# Altium PCB PCB.PcbDoc
Units mil, origin at the board's own origin, x right, y up, seen from the top; angles counter-clockwise.
Board outline 5250.03 x 2650.03 mil, 2 copper layers (Top Layer, Bottom Layer); 33 components, 44 nets, 150 pads, 4 vias.
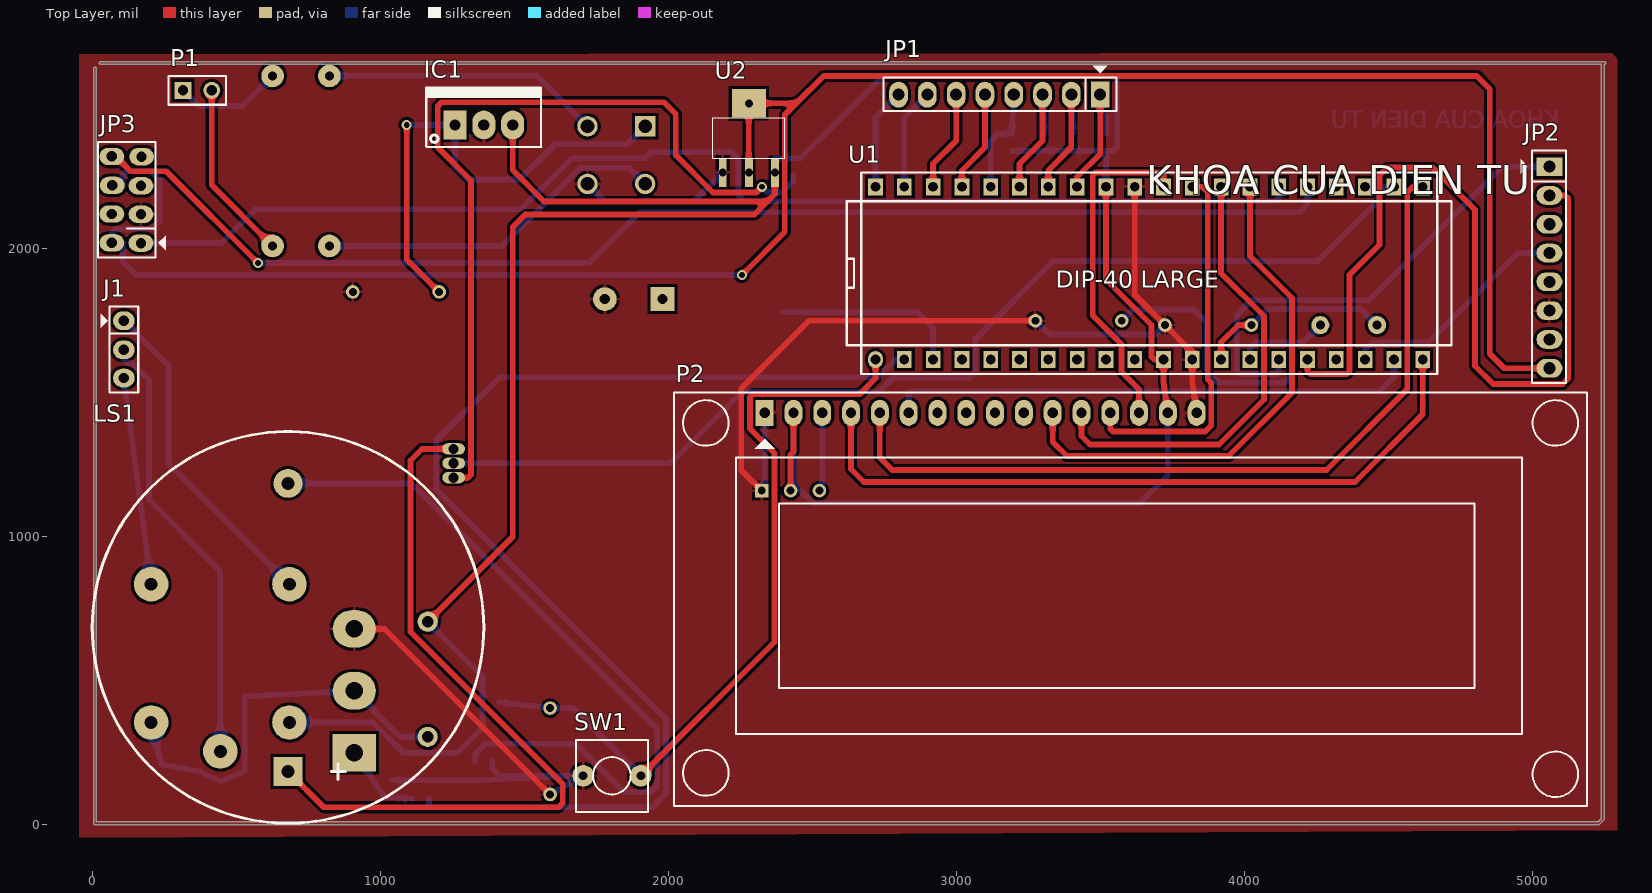
[diagram p0: Top Layer view]
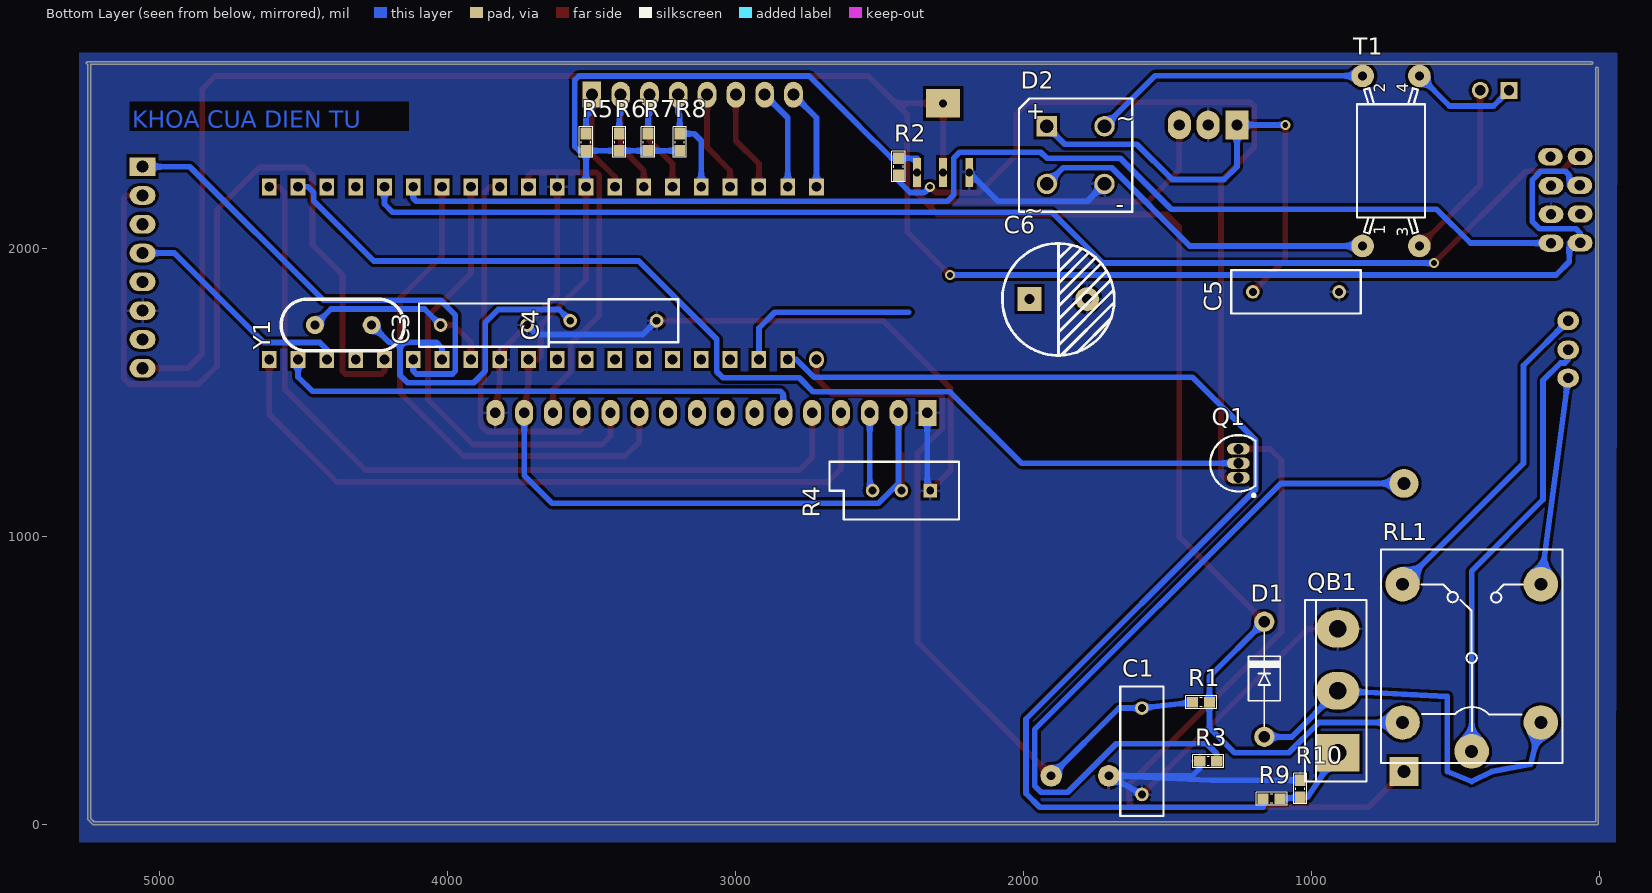
[diagram p1: Bottom Layer view, seen from below]

## Layer stack, top to bottom
Top Solder: solder mask 0.4, Solder Resist, Dk 3.5
Top Layer: signal copper 1.4
Dielectric 1: dielectric 12.6, FR-4, Dk 4.8
Bottom Layer: signal copper 1.4
Bottom Solder: solder mask 0.4, Solder Resist, Dk 3.5

## Board outline
4.99,5 ccw(c10,5) 10,-0.01 5230,-0.01 ccw(c5230,5) 5233.56,1.47 5233.55,1.45 5248.55,16.45 5248.53,16.44 ccw(c5245,20) 5250.02,20 5250.02,2637.92 5253.55,2641.45 5253.53,2641.44 ccw(c5250,2645) 5255.02,2645 ccw(c5250,2645) 5250,2650.01 30,2650.01 ccw(c30,2645) 30,2639.99 5239.98,2639.99 5239.98,22.08 5227.92,10.01 15.01,10.01 15.01,2625 ccw(c10,2625) 4.99,2625

## Design rules (kind name [scope] priority, off if disabled: settings)
Clearance [All] p1: gap=10
PolygonConnect [All] p1: connectstyle=Relief reliefconductorwidth=10 reliefentries=4 polygonreliefangle="90 Angle" airgapwidth=10
RoomDefinition schematic [InComponentClass('schematic')] p1: confinementstyle=ConfineIn formatcopy=TRUE lockcomponents=FALSE outline 6130,355 16020,355 16020,3645 6130,3645
RoutingVias [All] p1: holewidth=20 width=35 viastyle="Through Hole" minholewidth=15 minwidth=25 maxholewidth=28 maxwidth=50
SMDNeckDown [All] p1: percent=50.000
SolderMaskExpansion [All] p1: expansion=4
Width [All] p1: maxlimit=50 minlimit=10 preferedwidth=20
30 further rules are at their usual default settings.

## Classes and differential pairs
component class schematic: C1 C3 C4 C5 C6 D1 J1 JP1 JP2 JP3 LS1 P1 P2 Q1 QB1 R1 R2 R3 R4 R5 R6 R7 R8 R9 R10 RL1 SW1 T1 U1 U2 Y1

## Components (designator, comment, footprint, x,y, rotation, side; value= is the part's Value field where it differs from the comment)
C1 "Cap" RAD-0.3 1590,255 r90 bottom
C3 "Cap" RAD-0.3 3875,1735 r0 bottom
C4 "Cap" RAD-0.3 3425,1750 r0 bottom
C5 "Cap" RAD-0.3 1055,1850 r0 bottom
C6 "1000uF" "tu hoa 10mm" 1880,1825 r180 bottom
D1 "Diode" DIO-1A 1165,305 r90 bottom
D2 "Bridge1" D-38 1820,2325 r180 bottom
IC1 "LM7805" QTO-220 1260,2430 r0 top
J1 "Jumper 3" JP3 110,1650 r270 top
JP1 "JP8 PIN" JP8 3500,2535 r180 top
JP2 "JP8 PIN" JP8 5060,2285 r270 top
JP3 "Connector 4x2" JP4x2 120,2170 r90 top
LS1 "Còi Chip 5V 9.5x12MM" SP1 680,185 r0 top
P1 "Header 2" HDR1X2 315,2550 r0 top
P2 "LCD16x2" LCD16X2 2335,1430 r0 top
Q1 "2N3906" TO-92A 1255,1255 r180 bottom
QB1 "D718" QTO-247 910,250 r90 bottom
R1 "10k" "tro smd 0603" 1385,425 r180 bottom
R2 "10k" "tro smd 0603" 2435,2285 r90 bottom
R3 "10k" "tro smd 0603" 1360,220 r180 bottom
R4 "RPot" VR5 2425,1160 r0 bottom
R5 "330" "tro smd 0603" 3520,2370 r90 bottom
R6 "330" "tro smd 0603" 3405,2370 r90 bottom
R7 "330" "tro smd 0603" 3305,2370 r90 bottom
R8 "330" "tro smd 0603" 3195,2370 r90 bottom
R9 "1k" "tro smd 0603" 1140,90 r180 bottom
R10 "10k" "tro smd 0603" 1040,125 r90 bottom
RL1 "Relay 10A/12V" RL_SPDT_10A 445,255 r90 bottom
SW1 "SW" SW2 1705,170 r0 top
T1 "Trans" TRANS 725,2305 r90 bottom
U1 "PIC16F877A-E/P" DIP.100/40/W.600/L2.100 3670,1915 r0 top
U2 "LM1117-3.3V" LM1117-Hole 2280,2315 r0 top
Y1 "20MHz" XTAL 4365,1735 r0 bottom

## Footprints (in the part's own frame and the unit in brackets; to place one, negate y for a bottom-side part, rotate by r counter-clockwise, add the part's x,y. Pads: shape width x height; smd on the part's side, far side on the other; paste and mask are expansions set on the pad)
D-38 [mm] "Bridge Rectifier; 4 Terminals; Body 9.4 x 9.4 mm (typ); Pitch 5.08 mm"
  rect 1.8x1.8 hole 1.2: 1(-2.54,2.54)
  round 1.8 hole 1.2: 2(-2.54,-2.54) 3(2.54,-2.54) 4(2.54,2.54)
  silkscreen extent -5,-5 5,5, body extent -5,-5 5,5, height 9.91
DIO-1A [mil]
  round 70 hole 40: 1(0,0) 2(400,0)
  silkscreen extent 35,-55 365,55, body extent -11,-50 411,54, height 102
DIP.100/40/W.600/L2.100 [mil]
  oval 51.18x59.06 hole 34: 1(-950,-300)
  rect 51x59 / inner round 58 / far side rect 51x59 hole 34: 2(-850,-300) 3(-750,-300) 4(-650,-300) 5(-550,-300) 6(-450,-300) 7(-350,-300) 8(-250,-300) 9(-150,-300) 10(-50,-300) 11(50,-300) 12(150,-300) 13(250,-300) 14(350,-300) 15(450,-300) 16(550,-300) 17(650,-300) 18(750,-300) 19(850,-300) 20(950,-300) 21(950,300) 22(850,300) 23(750,300) 24(650,300) 25(550,300) 26(450,300) 27(350,300) 28(250,300) 29(150,300) 30(50,300) 31(-50,300) 32(-150,300) 33(-250,300) 34(-350,300) 35(-450,300) 36(-550,300) 37(-650,300) 38(-750,300) 39(-850,300) 40(-950,300)
  silkscreen extent -1050,-350 1050,350, body extent -1032,-305 1032,305, height 224
HDR1X2 [mm] "Connector; Header; 2 Position"
  rect 1.5x1.5 hole 0.9: 1(0,0)
  round 1.5 hole 0.9: 2(2.54,0)
  silkscreen extent -1.27,-1.27 3.81,1.27
JP3 [mil] "Jumper 3"
  oval 65x75 hole 36: 1(-100,0) 2(1,0) 3(99,0)
  silkscreen extent -150,-81 150,50, body extent -150,-60 150,55, height 355
JP4x2 [mil] "Connector 4x2"
  oval 60x86 hole 36: 1(-150.5,-49.5) 2(-50.5,-49.5) 3(48.5,-49.5) 4(149.5,-51.5) 5(-149.5,51.5) 6(-49.5,51.5) 7(50,50) 8(150.5,51.5)
  silkscreen extent -200,-135 200,101, body extent -197,-100 203,100, height 335
JP8 [mil] "JP8"
  rect 65x90 hole 42: 1(0,0)
  oval 65x90 hole 42: 2(100,0) 3(200,0) 4(300,0) 5(400,0) 6(500,0) 7(600,0) 8(700,0)
  silkscreen extent -56,-100 752,57, body extent -48,-50 748,48, height 323
LCD16X2 [mil] "LCD dipslay 16x2, 16 pin"
  rect 62x90 hole 36: 1(0,0)
  oval 62x90 hole 36: 2(100,0) 3(200,0) 4(300,0) 5(400,0) 6(500,0) 7(600,0) 8(700,0) 9(800,0) 10(900,0) 11(1000,0) 12(1100,0) 13(1200,0) 14(1300,0) 15(1400,0) 16(1500,0)
  silkscreen extent -315,-1365 2855,70, body extent -315,-1360 2855,77, height 914
LM1117-Hole [mm]
  rect 0.7x2.54 hole 0.7: 1(-2.3,-1.27) 2(0,-1.27) 3(2.3,-1.27)
  rect 3x2.54 hole 0.7: 2(0,4.826)
  silkscreen extent -3.17,0 3.17,3.56, body extent -3.25,-1.7 3.25,5.26, height 1.68
QTO-220 [mil] "TO-220 - 1-2-3"
  rect 80x100 hole 39: 1(0,0)
  oval 80x100 hole 39: 2(100,0) 3(200,0)
  silkscreen extent -100,-76 300,130, body extent -119,-64 322,121, height 755
QTO-247 [mil] "TO-247"
  rect 130x150 hole 60: 1(0,0)
  oval 130x150 hole 60: 2(215,0) 3(430,0)
  silkscreen extent -100,-100 530,113, body extent -89,-78 511,102, height 941
RAD-0.3 [mm] "Radial Cap, Thru-Hole; 2 Leads; 0.3 in Pin Spacing"
  round 1.2 hole 0.7: 1(-3.81,0) 2(3.81,0)
  silkscreen extent -5.71,-1.91 5.71,1.91
RL_SPDT_10A [mil] "Relay SPDT, 5 pin, 10A,W 650mil, L 800mil, H 800mil"
  round 120 hole 45: 1(0,0) 2(580,240) 3(580,-240) 4(100,-240) 5(100,240)
  silkscreen extent -40,-315 700,315
SP1 [mil] "Speaker Telphone on Broad"
  rect 100x100 hole 45: 1(0,0)
  round 100 hole 45: 2(0,1000)
  silkscreen extent -680,-180 680,1180, body extent -667,-175 652,1144, height 383
SW2 [mil] "SW button 2pin, 250x 250 mil"
  round 75 hole 31: 1(0,0) 2(200,0)
  silkscreen extent -25,-125 225,125
TO-92A [mm] "TO, Flat Index; 3 In-Line, Axial Leads; Body Dia. 4.5mm; Leads 0.51 x 0.48 mm (max)"
  oval 2x1 hole 0.9: 1(0,-1.27) 2(0,0) 3(0,1.27)
  silkscreen extent -2.48,-2.95 1.5,2.48, body extent -2.48,-2.5 1.5,2.5, height 6.86
TRANS [mm] "Transformer; 4 Leads"
  round 2 hole 0.8: 1(-7.5,2.5) 2(7.5,2.5) 3(-7.5,-2.5) 4(7.5,-2.5)
  silkscreen extent -6.4,-3 6.4,3
"tro smd 0603" [mm] "Chip Capacitor, 2-Leads, Body 1,60x0,80mm, IPC Medium Density"
  rect 1x0.95 smd mask+0.076: 1(-0.75,0) 2(0.75,0)
  silkscreen extent -1.35,-0.58 1.37,0.58, body extent -0.82,-0.42 0.82,0.43, height 0.44
"tu hoa 10mm" [mm]
  rect 2.1x2.1 hole 0.9: 1(-2.54,0)
  round 2.1 hole 0.9: 2(2.54,0)
  silkscreen extent -4.95,-4.96 4.93,4.92, body extent -5,-5 5.01,5, height 20.01
VR5 [mm] "Thru-Hole; 3 Leads"
  rect 1.2x1.2 hole 0.7: 1(-2.54,0)
  round 1.2 hole 0.7: 2(0,0) 3(2.54,0)
  silkscreen extent -5.08,-2.54 6.35,2.54
XTAL [mm]
  round 1.6 hole 0.8: 1(-2.552,0.001) 2(2.448,0.001)
  silkscreen extent -5.44,-2.29 5.44,2.29, body extent -5.55,-2.32 5.62,2.35, height 3.63

## Part data
C1 C3 C4 C5: "Capacitor"
C6: library part "Tu Hoa 1500uF 16V 10x20", "C?m"
D1: "Default Diode"
D2: "Full Wave Diode Bridge"
IC1: library part LM78xx, "On ap +, from + 5 to + 24VDC"
J1: library part JP3
JP1 JP2: library part JP8
JP3: library part "Header 4X2", "Header, 4-Pin, Dual row"
LS1: library part "Coi Chip 5V", "C?m"
P1: "Header, 2-Pin"
P2: library part "LCD Text"
Q1: "PNP General Purpose Amplifier"
QB1: "Transistor Power Supply"
R1 R2 R3 R10: library part "Tro 0603 1% 10k", "Dán"
R4: "Potentiometer"
R5 R6 R7 R8 R9: library part "Tro 0603 1% 1k", "Dán"
RL1: library part "Relay 1", "Relay SPDT,10A - 12VDC 5 Pin"
SW1: library part SW2, "Switch button 2 pin"
T1: "Transformer (12V-6VA)"
U1: "Enhanced FLASH Microcontroller, 8K (x14-Bit words) FLASH, 368 Bytes RAM, 40-Pin PDIP, Standard VDD Range, Extended Temperature"
U2: library part LM1117, "800mA Low-Dropout Linear Regulator"
Y1: library part XTAL, "Crystal Oscillator"

## Via types
v1: diameter 35, hole 20, Top Layer to Bottom Layer, tented both sides, 4 vias

## Nets (pads, with @x,y where several pads share a name; then routed paths per layer and width w, separated by ;. In a path a pad name is that pad's centre, name@x,y a point inside that pad or via, vN(x,y) a via of type N, cw(c..) or ccw(c..) an arc to the next point about the centre after c; other vN are vias at no path point)
3.3V: JP2.8 JP3.5 JP3.7 U2.2 | length 7544.8
  Top Layer w20: v1(2256,1909) 2405,2058 2405,2465 2445,2505 ; U2.2@2280,2265 2280,2505 2445,2505 ; JP2.8 4903,1585 4853,1635 4853,2555 4808,2600 2540,2600 2445,2505
  Bottom Layer w20: JP3.7 106,2220 106,2255 120,2269 205,2269 235,2239 235,2095 209.5,2069.5 83,2069.5 68.5,2055 JP3.5 106,2020.5 106,1955 152,1909 v1(2256,1909)
5V: D1.2 IC1.3 P2.2 P2.15 R1.2 R2.2 R4.2 R5.1 R6.1 R7.1 R8.1 RL1.5 U1.11 U1.32 U2.3 | length 9890.7
  Top Layer w20: D1.2 1460,1000 1460,2075 1504,2119 2300,2119 2345,2164 ; IC1.3 1460,2273 1569,2164 2345,2164 ; U2.3 2370.55,2189.55 2345,2164 ; R4.2 2425,1285 2435,1295 P2.2 ; U1.32 3520,1893 3678,1735 3678,1625 3688,1615 U1.11 3720,1538 P2.15
  Bottom Layer w18.7: U2.3@2370.55,2314.53 R2.2 2460,2314.53 2574,2428.53 ; R5.1 3545.47,2340.47 3559,2354 3559,2586
  Bottom Layer w20: RL1.5 975,355 1080,250 1268.47,250 1355.47,337 R1.2 1355.47,514.53 D1.2 ; U2.3 U2.3@2370.55,2314.53 ; P2.2 2435,1186 2505,1116 3638,1116 3735,1213 P2.15 ; 2574,2428.53 2745.47,2600 3545,2600 3559,2586 ; R8.1 R7.1 R6.1 R5.1 U1.32
A0: R9.1 U1.2 | length 4169.5
  Bottom Layer w20: R9.1 1169.53,61 1945,61 1992.5,108.5 1992.5,367.5 1195,1165 1195,1335 1414,1554 2729,1554 2790,1615 U1.2
B0: JP1.1 R5.2 U1.33 | length 496.9
  Top Layer w20: U1.33 3420,2249 3500,2329 JP1.1
  Bottom Layer w20: JP1.1 3500,2477 3520,2457 R5.2
B1: JP1.2 R6.2 U1.34 | length 490.7
  Top Layer w20: U1.34 3320,2272 3400,2352 JP1.2
  Bottom Layer w20: JP1.2 3400,2469 3405,2464 R6.2
B2: JP1.3 R7.2 U1.35 | length 490.7
  Top Layer w20: U1.35 3220,2295 3300,2375 JP1.3
  Bottom Layer w20: JP1.3 3300,2469 3305,2464 R7.2
B3: JP1.4 R8.2 U1.36 | length 382.7
  Bottom Layer w20: U1.36 3120,2375 3144.53,2399.53 R8.2 3195,2464 3200,2469 JP1.4
B4: JP1.5 U1.37 | length 353.1
  Top Layer w20: U1.37 3020,2272 3100,2352 JP1.5
B5: JP1.6 U1.38 | length 353.1
  Top Layer w20: U1.38 2920,2295 3000,2375 JP1.6
B6: JP1.7 U1.39 | length 353.1
  Bottom Layer w20: U1.39 2820,2455 JP1.7
B7: JP1.8 U1.40 | length 353.1
  Bottom Layer w20: U1.40 2720,2455 JP1.8
CS: JP2.1 U1.15 | length 1688.6
  Bottom Layer w20: U1.15 4120,1575 4110,1565 3984,1565 3974,1575 3974,1770 4025,1821 4432,1821 4896,2285 JP2.1
D0: P2.6 U1.19 | length 1834.9
  Bottom Layer w20: P2.6 2835,1495 2845,1505 4470,1505 4520,1555 U1.19
D1: P2.4 U1.20 | length 2486
  Top Layer w20: P2.4 2635,1235 2680,1190 4385,1190 4620,1425 U1.20
D2: P2.5 U1.21 | length 2865.1
  Top Layer w20: P2.5 2735,1275 2778,1232 4286,1232 4566,1512 4566,2195 4586,2215 U1.21
D3: Q1.2 U1.22 | length 3745.8
  Bottom Layer w20: Q1.2 2008,1255 2256,1503 2731,1503 2780,1552 3045,1552 3066,1573 3066,1686 3337,1957 4257,1957 4466,2166 4466,2195 4486,2215 U1.22
D4: P2.11 U1.27 | length 1818.3
  Top Layer w20: P2.11 3335,1330 3385,1280 3946,1280 4166,1500 4166,1829 4020,1975 U1.27
D5: P2.12 U1.28 | length 1591.8
  Top Layer w20: P2.12 3435,1350 3465,1320 3913,1320 4069,1476 4069,1766 3920,1915 U1.28
D6: P2.13 U1.29 | length 1295.1
  Top Layer w20: P2.13 3535,1375 3545,1365 3865,1365 3886,1386 3886,1534 3874,1546 3874,2195 3854,2215 U1.29
D7: P2.14 U1.30 | length 1186
  Top Layer w20: P2.14 3635,1512 3574,1573 3574,1668 3474,1768 3474,2255 3484,2265 3710,2265 3720,2255 U1.30
GND: C1.1 C3.1 C4.1 C5.1 C6.2 D2.3 IC1.2 JP2.6 JP3.2 P2.1 P2.16 QB1.3 R3.1 R4.1 R10.2 SW1.1 U1.12 U1.31 U2.1 | length 5731.5
  Top Layer w20: QB1.3 1015,680 C1.1 ; R4.1 2254,1231 2254,1515 2489,1750 C4.1 ; U1.31 3620,1840 C3.1 3820,1640 U1.12 3820,1538 P2.16
  Bottom Layer w18.7: 1389.53,195 1414.53,170
  Bottom Layer w20: R10.2 1349.06,154.53 SW1.1 ; 1389.53,195 R3.1 ; 1414.53,170 SW1.1 ; C1.1 SW1.1 ; D2.3 1780,2165 2089.45,2165 U2.1 ; R4.1 2335,1170 P2.1 ; C4.1 3323,1702 3692,1702 C3.1
MCLR: C1.2 R1.1 SW1.2 U1.1 | length 2659.3
  Top Layer w20: SW1.2 2369,634 2369,1290 2284,1375 2284,1485 2294,1495 2665,1495 2720,1550 U1.1
  Bottom Layer w20: R1.1 C1.2 1670,405 SW1.2
N1: P1.1 T1.4 | length 377.1
  Bottom Layer w20: P1.1 369,2496 522.3,2496 T1.4
N2: P1.2 T1.3 | length 627.9
  Top Layer w20: P1.2 415,2221.3 T1.3
NetC3_2: C3.2 U1.13 Y1.2 | length 672.6
  Top Layer w20: U1.13 3920,1675 3980,1735 C3.2
  Bottom Layer w20: C3.2 4081,1791 4405.36,1791 Y1.2
NetC4_2: C4.2 U1.14 Y1.1 | length 1253.8
  Bottom Layer w20: C4.2 3614,1789 3825,1789 3870,1744 3870,1575 3910,1535 4140,1535 4166,1561 4166,1675 ; U1.14 4020,1655 4040,1675 4166,1675 ; Y1.1 4204.56,1675 4166,1675
NetC5_2: C5.2 D2.1 IC1.1 | length 1695.1
  Top Layer w20: v1(1092,2430) 1092,1963 C5.2
  Bottom Layer w20: v1(1092,2430) IC1.1 1260,2285 1305,2240 1485,2240 1608,2363 1858,2363 D2.1
NetD1_1: D1.1 QB1.2 RL1.4 | length 1418.4
  Bottom Layer w20: RL1.4 240,210 375,185 445,150 530,185 530,445 QB1.2 1070,305 D1.1
NetD2_2: D2.2 T1.1 | length 1232.1
  Bottom Layer w20: T1.1 1423.72,2009.72 1695,2281 1864,2281 D2.2
NetD2_4: D2.4 T1.2 | length 969.2
  Bottom Layer w20: T1.2 1544.72,2600.28 D2.4
NetJ1_1: J1.1 RL1.2 | length 1153.2
  Bottom Layer w20: J1.1 265,1595 265,1255 RL1.2
NetJ1_2: J1.2 RL1.1 | length 1541.7
  Bottom Layer w20: J1.2 110,1615 121.5,1603.5 136.75,1603.5 197.18,1543.07 197.18,1129.02 445,881.19 RL1.1
NetJ1_3: J1.3 RL1.3 | length 722.3
  Bottom Layer w20: J1.3 RL1.3
NetLS1_1: LS1.1 Q1.3 | length 2586.8
  Top Layer w20: LS1.1 804,61 1620,61 1634,75 1634,141 1105,670 1105,1265 1145,1305 Q1.3
NetLS1_2: LS1.2 R3.2 | length 2583.9
  Bottom Layer w20: LS1.2 1108,1185 1962.5,330.5 1962.5,135 1940,112.5 1847.5,112.5 1679,281 1365,281 1330.47,246.47 R3.2
NetP2_3: P2.3 R4.3 | length 274.1
  Bottom Layer w20: R4.3 2535,1170 P2.3
NetQ1_1: Q1.1 R2.1 | length 2900
  Top Layer w20: Q1.1 1305,1205 1315,1215 1315,2237 1200,2352 1200,2495 1214,2509 1985,2509 2026,2468 2026,2325 2156,2195 2306,2195 v1(2326,2215)
  Bottom Layer w18.7: 2395,2195 2435,2235 R2.1
  Bottom Layer w20: v1(2326,2215) 2346,2195 2395,2195
NetQB1_1: QB1.1 R9.2 R10.1 | length 282.9
  Bottom Layer w20: QB1.1 1015,95 R10.1 R9.2
RST: U1.23
RX: JP3.1 U1.26 | length 4270.7
  Bottom Layer w20: JP3.1 449.5,2019.5 567,2137 1488,2137 1665,2314 1920,2314 1941,2335 2223,2335 2243,2315 2243,2187 2265,2165 4110,2165 4120,2175 U1.26
SCK: JP2.2 U1.16 | length 2915
  Top Layer w20: U1.16 4220,1575 4230,1565 4356,1565 4366,1575 4366,1910 4470,2014 4470,2255 4497,2282 4655,2282 4802,2135 4802,1593 4865,1530 5105,1530 5125,1550 5125,2175 5115,2185 JP2.2
SI: U1.17
SO: JP2.4 U1.18 | length 813.2
  Bottom Layer w20: U1.18 4420,1649 4445,1674 4639,1674 4950,1985 JP2.4
TX: JP3.8 U1.25 | length 4449.9
  Top Layer w20: JP3.8 82,2320.5 133.5,2269 257,2269 v1(576,1950)
  Bottom Layer w20: v1(576,1950) 1725,1950 1902,2127 4192,2127 4220,2155 U1.25
pads on no net: C6.1 JP2.3 JP2.5 JP2.7 JP3.3 JP3.4 JP3.6 P2.7 P2.8 P2.9 P2.10 U1.3 U1.4 U1.5 U1.6 U1.7 U1.8 U1.9 U1.10 U1.24
copper on no net: | length 652.3
  Bottom Layer w20: 2400,1779.53 2865,1779.53 2920,1724.53 2920,1615

## Polygon pours and split planes (outlines as drawn)
GND on Top Layer "Top Layer" (solid, pour order 2): -44.98,2674.96 -44.98,-44.96 5295,-20 5295,2660 5275,2680
GND on Bottom Layer "bottom Layer" (solid, remove dead copper, pour order 4): -60,2680 5280,2680 5280,-40 5280,-60 -55,-60

## Other copper
Bottom Layer:
  text "KHOA CUA DIEN TU" at 5095,2420 h60

## Silkscreen, mask and mechanical layers (free items; w line width, h text height)
Top Overlay:
  text "KHOA CUA DIEN TU" at 3660,2190 h100
Mechanical 13:
  lines w10: 10,2625 10,5 5230,5 5245,20 5245,2640 ; 30,2645 5250,2645 ; 2815,2415 2820,2420

## Text inside footprints (layer, text, board x,y; h text height)
D2: Bottom Overlay "+" at 1993.62,2449.57 h59.06; Bottom Overlay "-" at 1680,2125 h59.05; Bottom Overlay "~" at 2000,2105 h59.05; Bottom Overlay "~" at 1680,2425 h59.05
T1: Bottom Overlay "1" at 744.68,2049.09 h39.37 r270; Bottom Overlay "2" at 744.68,2541.22 h39.37 r270; Bottom Overlay "3" at 665.94,2042.2 h39.37 r270; Bottom Overlay "4" at 665.94,2541.22 h39.37 r270
U1: Top Overlay "DIP-40 LARGE" at 3345,1865 h59.05